# Altium PCB ESP32_C3.PcbDoc
Units mm, origin at the board's own origin, x right, y up, seen from the top; angles counter-clockwise.
Board outline 45.34 x 43.44 mm, 4 copper layers (Top Layer, GND02, signal03, Bottom Layer), stack 0.995 mm thick; 39 components, 42 nets, 202 pads, 101 vias.
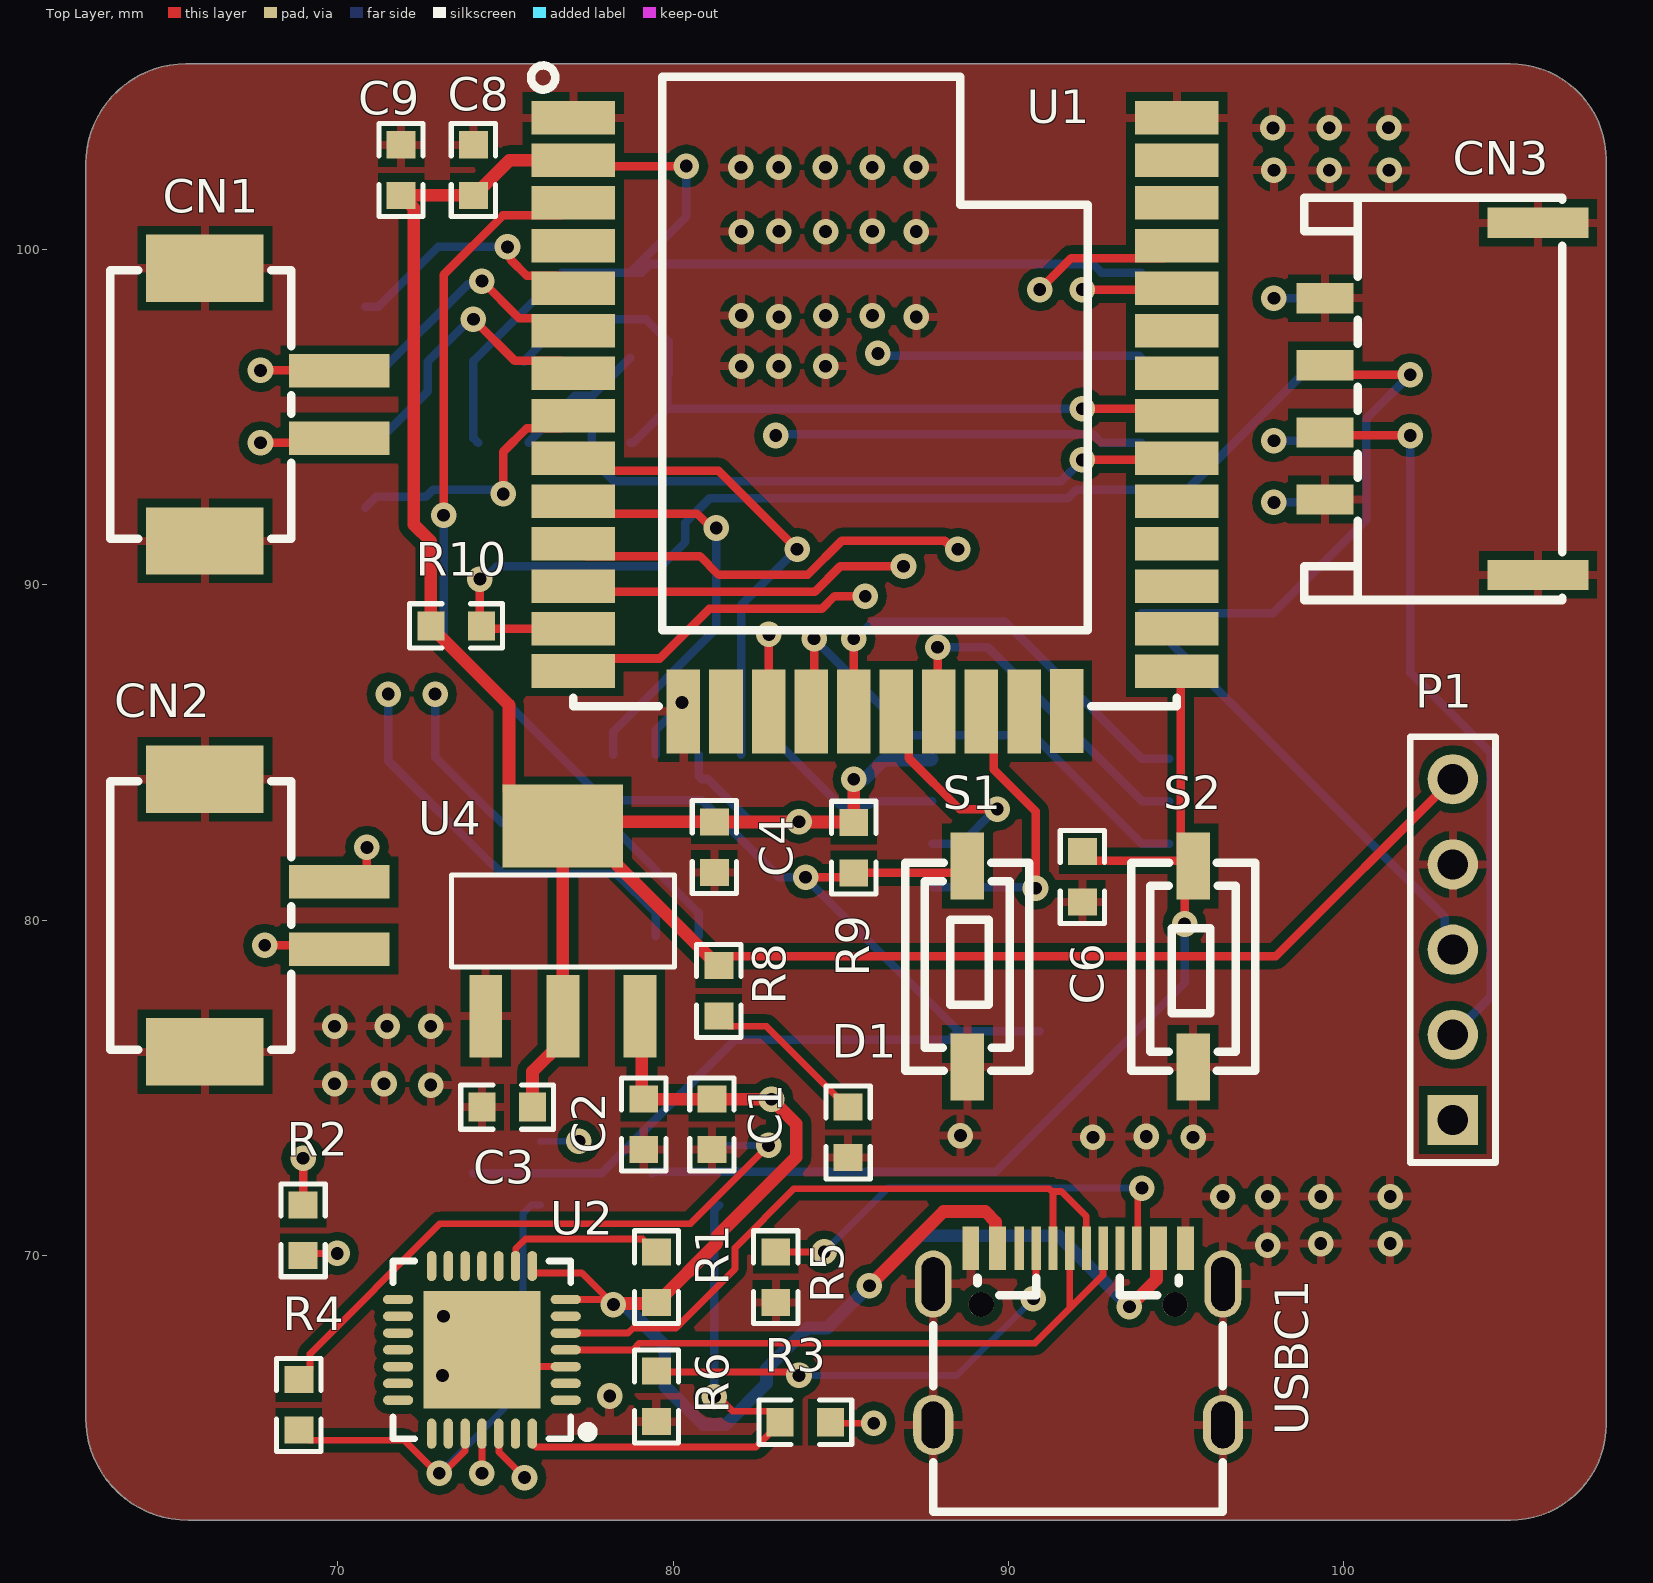
[diagram p0: Top Layer view]
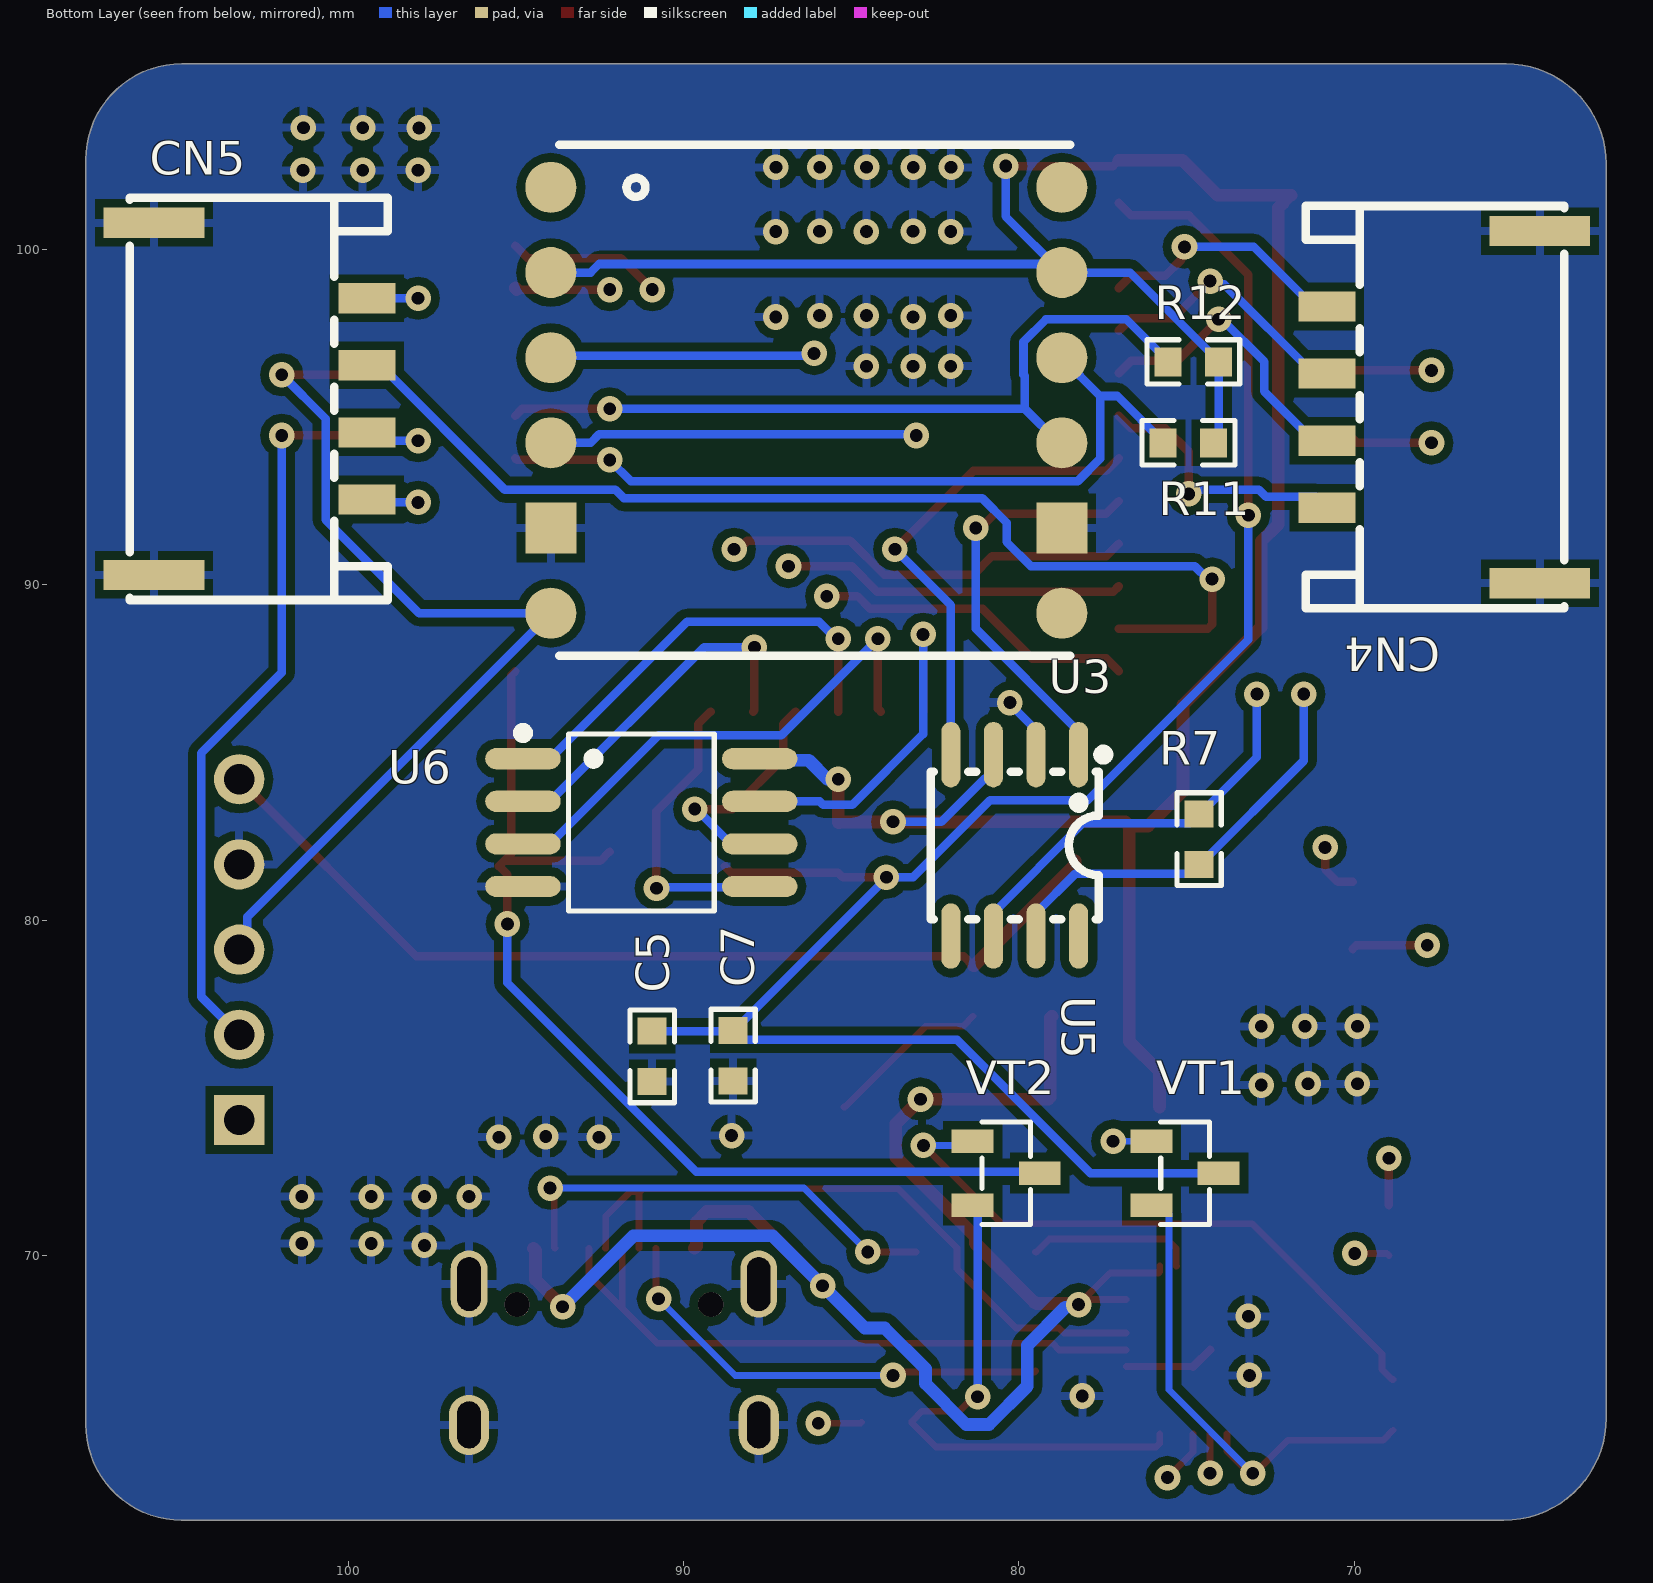
[diagram p1: Bottom Layer view, seen from below]
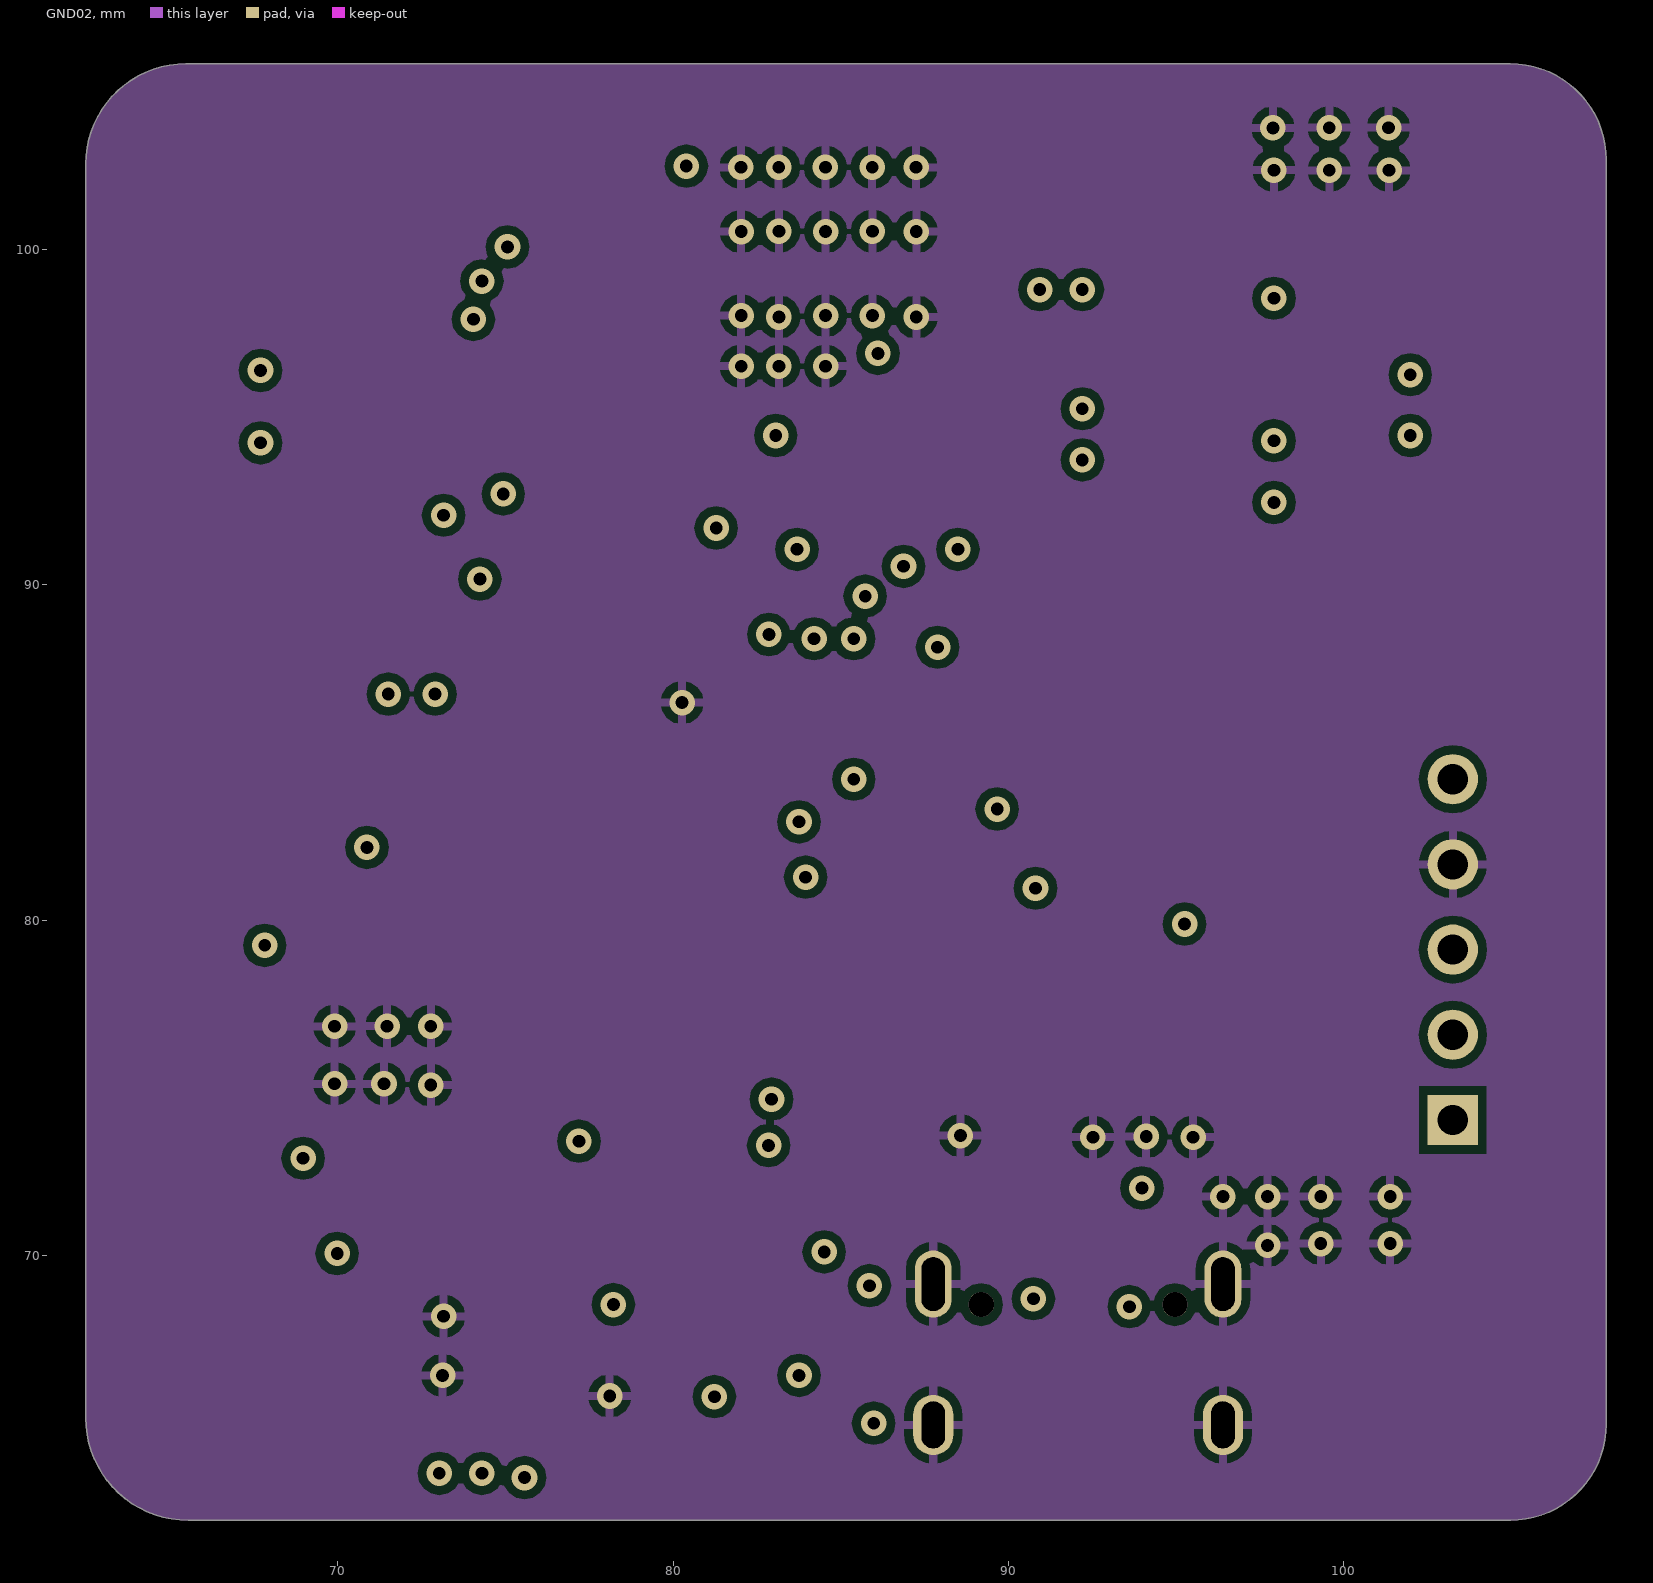
[diagram p2: GND02]
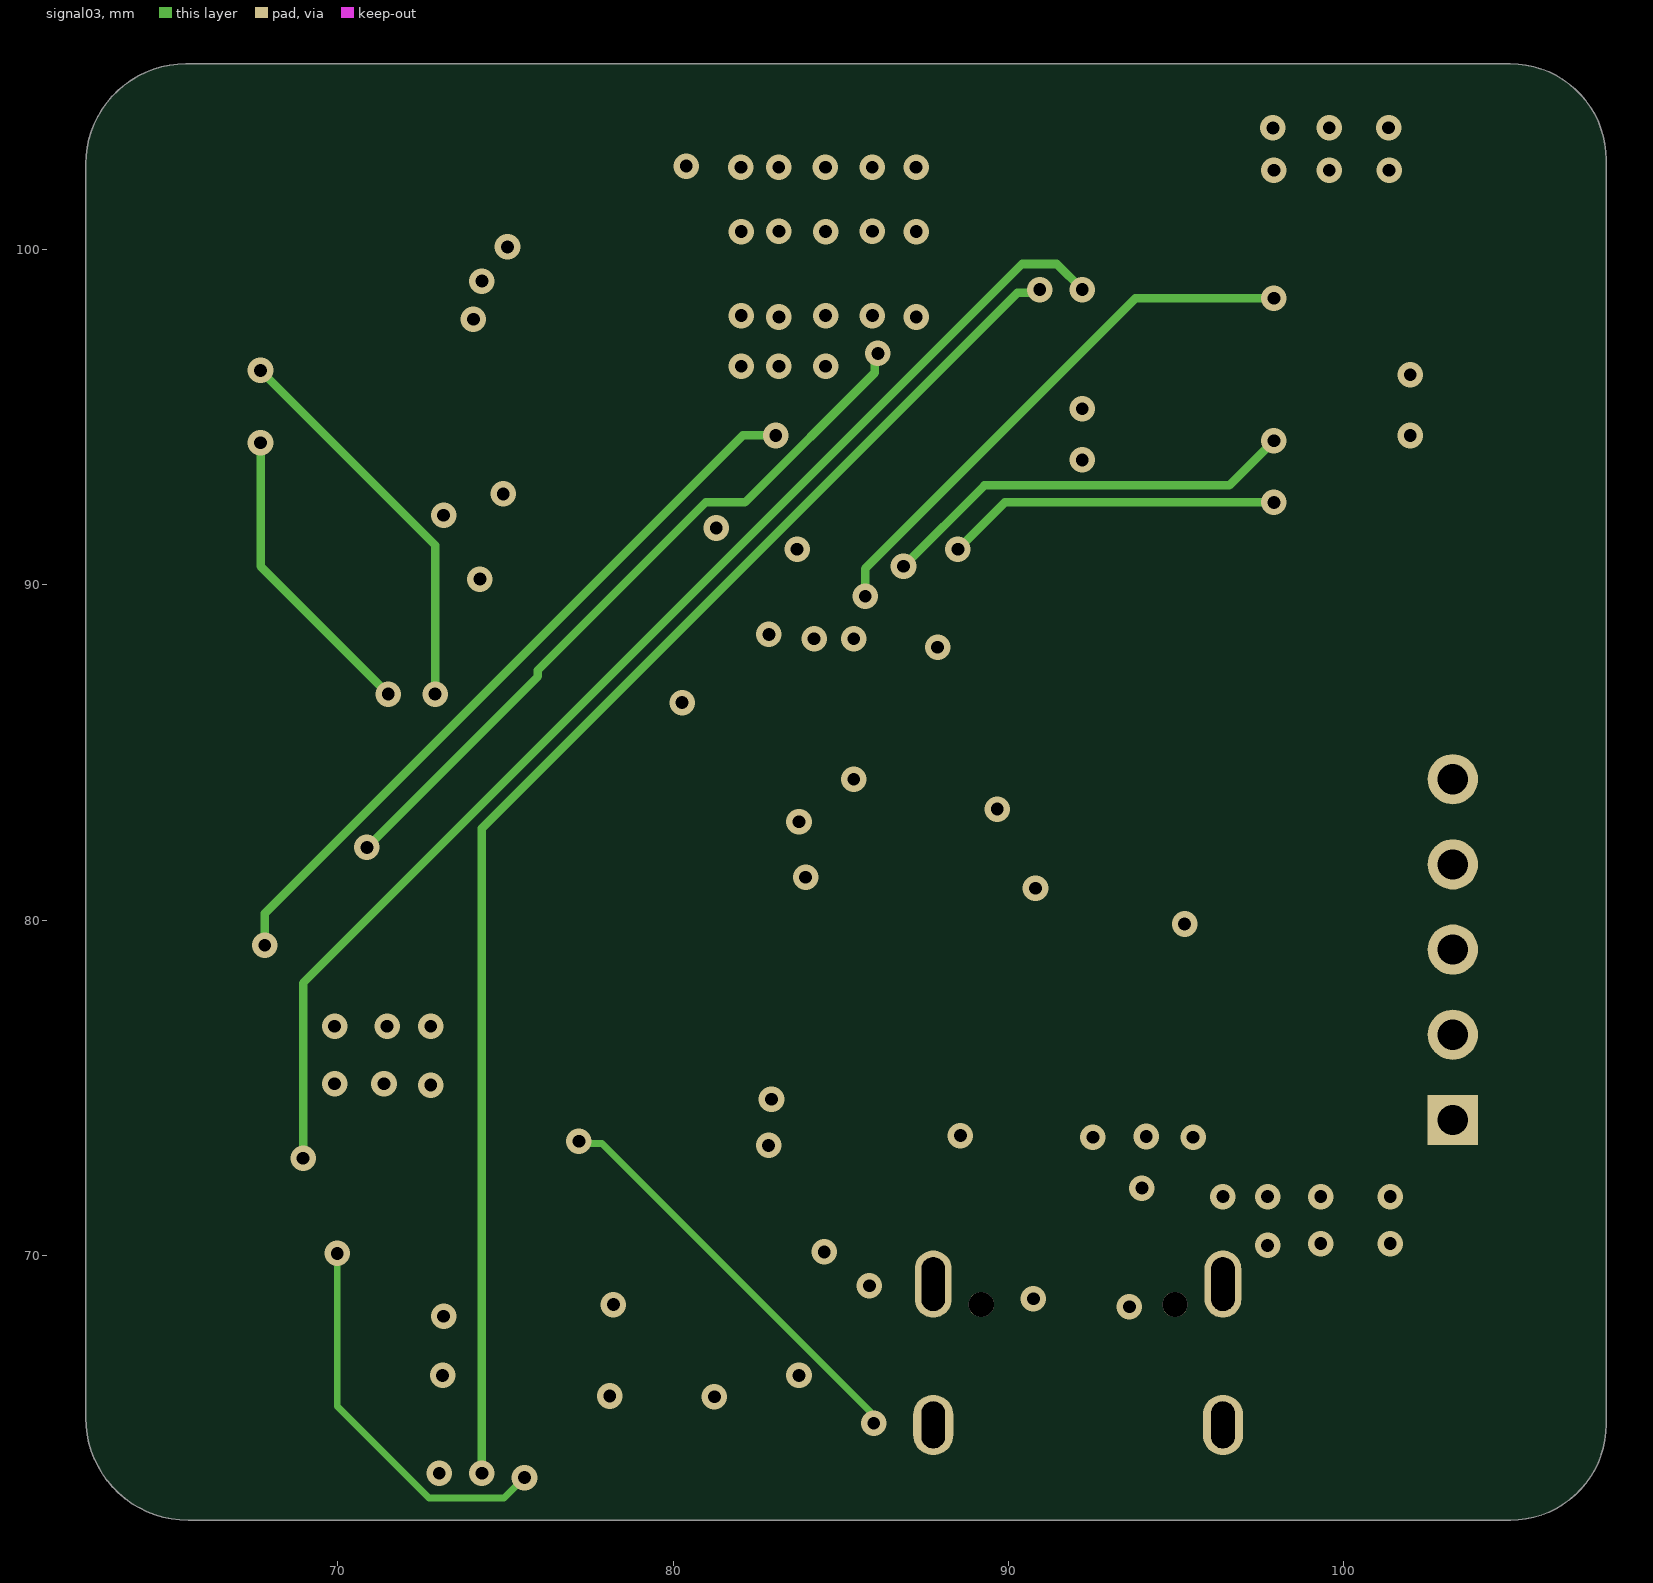
[diagram p3: signal03]

## Layer stack, top to bottom
Top Solder: solder mask 0.0102, Solder Resist, Dk 3.5
Top Layer: signal copper 0.0356
Dielectric 4: prepreg 0.0711, PP-006, Dk 4.1
Dielectric 2: prepreg 0.0711, PP-006, Dk 3.8
Dielectric4: dielectric 0.32, FR-4, Dk 4.8
GND02: signal copper 0.035
Dielectric 1: dielectric 0.32, FR-4, Dk 4.8
signal03: signal copper 0.035
Dielectric 3: prepreg 0.0711, PP-006, Dk 3.8
Bottom Layer: signal copper 0.0356
Bottom Solder: solder mask 0.0102, Solder Resist, Dk 3.5

## Board outline
62.481,65.151 62.481,102.551 62.483,102.552 cw(c65.468,102.552) 65.468,105.538 104.965,105.538 cw(c104.965,102.679) 107.824,102.679 107.824,64.962 107.824,64.961 cw(c104.966,64.961) 104.966,62.102 104.964,62.1 65.532,62.1 cw(c65.532,65.151)

## Design rules (kind name [scope] priority, off if disabled: settings)
Clearance [All] p1: gap=0.254 ignorepadtopadclearanceinfootprint=FALSE except(0: Arc-Hole Track-Hole SMDPad-Hole THPad-Hole Via-Hole Fill-Hole Poly-Hole Region-Hole Text-Hole)
PolygonConnect [All] p1: connectstyle=Relief reliefconductorwidth=0.254 reliefentries=4 polygonreliefangle="90 Angle" airgapwidth=0.254
RoutingVias [All] p1: holewidth=0.254 width=0.508 viastyle="Through Hole" minholewidth=0.203 minwidth=0.254 maxholewidth=0.711 maxwidth=1.27
SolderMaskExpansion [All] p1: expansion=0.102
Width [All] p1: maxlimit=0.508 minlimit=0.203 preferedwidth=0.254
30 further rules are at their usual default settings.

## Components (designator, comment, footprint, x,y, rotation, side; value= is the part's Value field where it differs from the comment)
C1 "Cap" R0603 81.004,72.99 r90 top value=10uF
C2 "Cap" R0603 78.972,72.99 r90 top value=0.1uF
C3 "Cap" R0603 74.133,74.571 r0 top value=0.1uF
C4 "Cap" R0603 81.079,81.263 r90 top value=10uF
C5 "Cap" R0603 91.081,75.022 r90 bottom value=1uF
C6 "Cap" R0603 92.053,80.374 r90 top value=0.1uF
C7 "Cap" R0603 88.668,75.04 r90 bottom value=0.1uF
C8 "Cap" R0603 74.19,103.286 r270 top value=0.1uF
C9 "Cap" R0603 72.031,103.286 r270 top value=10uF
CN1 "PH2.0-2P" CONN-SMD_PH2.0-1X2PW 67.31,95.377 r90 top
CN2 "PH2.0-2P" CONN-SMD_PH2.0-1X2PW 67.31,80.137 r90 top
CN3 "PH2.0-4PWB卧式" CONN-SMD_PH2.0-4PWB 102.941,95.547 r270 top
CN4 "PH2.0-4PWB卧式" CONN-SMD_PH2.0-4PWB 67.31,95.298 r270 bottom
CN5 "PH2.0-4PWB卧式" CONN-SMD_PH2.0-4PWB 102.941,95.547 r90 bottom
D1 "LED3" R0603 85.366,74.584 r270 top
P1 "Header 5" HDR1X5 103.251,74.041 r90 top
R1 "10K" R0603 79.353,68.436 r90 top value=22R
R2 "200R" R0603 69.11,71.663 r270 top value=22R
R3 "12K" R0603 83.023,65.173 r0 top value=22R
R4 "12K" R0603 68.685,64.626 r90 top value=22R
R5 "5.1K" R0603 82.909,68.436 r90 top value=22R
R6 "5.1K" R0603 79.353,64.88 r90 top value=22R
R7 "120R/NC" R0603 74.771,81.499 r90 bottom value=22R
R8 "Res1" R0603 81.211,76.972 r90 top value=2K
R9 "Res1" R0603 85.234,81.245 r90 top value=10K
R10 "Res1" R0603 74.439,88.624 r180 top value=10K
R11 "Res1" R0603 75.854,94.383 r180 bottom value=4.7K
R12 "Res1" R0603 75.709,96.796 r180 bottom value=4.7K
S1 "SW-PB" SW-SMD_L6.1-W3.6-LS7.1 88.773,78.613 r270 top
S2 "SW-PB" SW-SMD_L6.1-W3.6-LS7.1 95.504,78.613 r90 top
U1 "ESP32-C3S-2M" WIFIM-SMD_ESP32-C3S-2M 86.013,98.238 r0 top
U2 "CP2102" QFN-28_L5.0-W5.0-P0.50-BL-EP 74.47,67.183 r90 top value=Value
U3 "SN65HVD232D" SOIC-8_L5.0-W4.0-P1.27-LS6.0-BL 80.755,83.312 r0 bottom
U4 "AMS1117-3.3V" SOT-223-4_L6.5-W3.5-P2.30-LS7.0-BR 406.832,550.589 r270 top
U5 "JY901S" JY901S-15.24*15.24 87.63,95.504 r180 bottom
U6 "W25Q32JVSSIQ" SOIC-8_L5.3-W5.3-P1.27-LS8.0-BL 92.329,82.169 r270 bottom
USBC1 "USB3.1C16PFSMT" USB-C-SMD_TYPE-C-USB-17 92.075,66.548 r0 top
VT1 "S8050" SOT-23-3_L2.9-W1.3-P1.90-LS2.4-BR -355.556,-349.113 r0 bottom
VT2 "S8050" SOT-23-3_L2.9-W1.3-P1.90-LS2.4-BR -350.222,-349.113 r0 bottom

## Footprints (in the part's own frame and the unit in brackets; to place one, negate y for a bottom-side part, rotate by r counter-clockwise, add the part's x,y. Pads: shape width x height; smd on the part's side, far side on the other; paste and mask are expansions set on the pad)
CONN-SMD_PH2.0-1X2PW [mm]
  rect 1x3 smd: 1(-1,-2.733) 2(1,-2.733)
  rect 2x3.5 smd: 3(4.064,1.278) 4(-4.064,1.278)
  silkscreen extent -4,-1.29 4,4.11
CONN-SMD_PH2.0-4PWB [mm]
  rect 0.9x1.7 smd: 1(-3,-3.5) 2(-1,-3.5) 3(1,-3.5) 4(3,-3.5)
  rect 0.9x3 smd: 5(5.25,2.85) 6(-5.25,2.85)
  silkscreen extent -6,-4.12 6,3.57
HDR1X5 [mm] "Connector; Header; 5 Position"
  rect 1.5x1.5 hole 0.9: 1(0,0)
  round 1.5 hole 0.9: 2(2.54,0) 3(5.08,0) 4(7.62,0) 5(10.16,0)
  silkscreen extent -1.27,-1.27 11.43,1.27
JY901S-15.24*15.24 [mil]
  round 60 smd: 1(-249.05,250) 2(-249.05,150) 3(-249.05,50) 4(-249.05,-50) 6(-249.05,-250) 7(350.95,250) 8(350.95,150) 9(350.95,50) 10(350.95,-50) 12(350.95,-250)
  rect 60x60 smd: 5(-249.05,-150) 11(350.95,-150)
  silkscreen extent -239,-300 361,300
QFN-28_L5.0-W5.0-P0.50-BL-EP [mm]
  oval 0.28x0.9 smd: 1(-1.501,-2.325) 2(-1.001,-2.325) 3(-0.501,-2.325) 4(0,-2.325) 5(0.5,-2.325) 6(1.001,-2.325) 7(1.501,-2.325) 15(1.501,2.675) 16(1.001,2.675) 17(0.5,2.675) 18(0,2.675) 19(-0.501,2.675) 20(-1.001,2.675) 21(-1.501,2.675)
  oval 0.9x0.28 smd: 8(2.5,-1.326) 9(2.5,-0.826) 10(2.5,-0.326) 11(2.5,0.175) 12(2.5,0.675) 13(2.5,1.176) 14(2.5,1.676) 22(-2.5,1.676) 23(-2.5,1.176) 24(-2.5,0.675) 25(-2.5,0.175) 26(-2.5,-0.326) 27(-2.5,-0.826) 28(-2.5,-1.326)
  rect 3.5x3.5 smd: 29(0,0.175)
  silkscreen extent -2.65,-3.12 2.65,2.82
R0603 [mm]
  rect 0.806x0.864 smd: 1(0.162,-0.149) 2(1.668,-0.149)
  silkscreen extent -0.47,-0.81 2.3,0.51
SOIC-8_L5.0-W4.0-P1.27-LS6.0-BL [mm]
  oval 0.568x1.95 smd: 1(-2.54,-1.623) 2(-1.27,-1.623) 3(0,-1.623) 4(1.27,-1.623) 5(1.27,3.787) 6(0,3.787) 7(-1.27,3.787) 8(-2.54,3.787)
  silkscreen extent -3.43,-1.77 1.87,3.28
SOIC-8_L5.3-W5.3-P1.27-LS8.0-BL [mm]
  oval 0.63x2.25 smd: 1(-2.644,-2.459) 2(-1.374,-2.459) 3(-0.104,-2.459) 4(1.166,-2.459) 5(1.166,4.601) 6(-0.104,4.601) 7(-1.374,4.601) 8(-2.644,4.601)
  silkscreen extent -3.56,-2.61 1.9,3.25
SOT-23-3_L2.9-W1.3-P1.90-LS2.4-BR [mm]
  rect 1.25x0.7 smd: 1(431.596,-422.514) 2(431.596,-420.614) 3(429.597,-421.564)
  silkscreen extent 429.87,-423.09 431.32,-420.04
SOT-223-4_L6.5-W3.5-P2.30-LS7.0-BR [mm]
  rect 2.47x0.98 smd: 1(473.455,-332.424) 2(473.455,-330.124) 3(473.455,-327.824)
  rect 2.47x3.6 smd: 4(467.785,-330.124)
  silkscreen extent 469.25,-333.45 471.99,-326.8
SW-SMD_L6.1-W3.6-LS7.1 [mm]
  rect 2x1 smd: 1(-3,0) 2(3,0)
  silkscreen extent -3.1,-1.85 3.1,1.85
USB-C-SMD_TYPE-C-USB-17 [mm]
  oval 1.2x1.8 hole 0.7 slot 1.4 at 90 deg: 0(-4.32,-1.604) 0(4.32,-1.604)
  oval 1.1x2 hole 0.7 slot 1.6 at 90 deg: 0(-4.32,2.596) 0(4.32,2.596)
  rect 0.5x1.3 smd: A1(-3.2,3.663) A4(-2.4,3.663) A9(2.4,3.663) A12(3.2,3.663)
  rect 0.28x1.3 smd: A5(-1.25,3.663) A6(-0.25,3.663) A7(0.25,3.663) A8(1.25,3.664) B5(1.75,3.663) B6(0.75,3.663) B7(-0.75,3.663) B8(-1.75,3.664)
  round 0.75 hole 0.75 unplated: ""(-2.89,1.986) ""(2.89,1.986)
  silkscreen extent -4.32,-4.19 4.32,2.78
WIFIM-SMD_ESP32-C3S-2M [mm]
  rect 2.5x1 smd: 1(-8.995,5.691) 2(-8.995,4.421) 3(-8.995,3.151) 4(-8.995,1.881) 5(-8.995,0.611) 6(-8.995,-0.659) 7(-8.995,-1.929) 8(-8.995,-3.199) 9(-8.995,-4.469) 10(-8.995,-5.739) 11(-8.995,-7.009) 12(-8.995,-8.279) 13(-8.995,-9.549) 14(-8.995,-10.809) 25(9.005,-10.819) 26(9.005,-9.549) 27(9.005,-8.279) 28(9.005,-7.009) 29(9.005,-5.739) 30(9.005,-4.469) 31(9.005,-3.199) 32(9.005,-1.929) 33(9.005,-0.659) 34(9.005,0.611) 35(9.005,1.881) 36(9.005,3.151) 37(9.005,4.421) 38(9.005,5.691)
  rect 1x2.5 smd: 15(-5.71,-12.018) 16(-4.44,-12.018) 17(-3.17,-12.018) 18(-1.9,-12.018) 19(-0.63,-12.018) 20(0.64,-12.018) 21(1.91,-12.018) 22(3.18,-12.018) 23(4.45,-12.018) 24(5.72,-12.003)
  silkscreen extent -10.25,-11.86 9.01,7.25

## Part data
C1 C2 C3 C4 C5 C6 C7 C8 C9: "Capacitor", LatestRevisionDate=17-Jul-2002, LatestRevisionNote="Re-released for DXP Platform.", PackageDescription="Radial Cap, Thru-Hole; 2 Leads; 0.3 in Pin Spacing", PackageReference=RAD-0.3, Published=8-Jun-2000, Publisher="Altium Limited"
D1: "Typical BLUE SiC LED", DatasheetVersion=16-Apr-2002, LatestRevisionDate=17-Dec-2003, LatestRevisionNote="PCB Footprint replaced.", PackageDescription="SM LED; 2 C-Bend Leads; Body 3.5 x 2.8 x 1.9 mm, inc leads (LxWxH typ)", PackageReference=3.5X2.8X1.9, PackageVersion=16-Apr-2002, Published=8-Jun-2000, Publisher="Altium Limited"
P1: "Header, 5-Pin", LatestRevisionDate=17-Jul-2002, LatestRevisionNote="Re-released for DXP Platform.", Publisher="Altium Limited"
R1 R2 R3 R4 R5 R6 R7: library part 电阻-0402, "Resistor"
R8 R9 R10 R11 R12: "Resistor", LatestRevisionDate=17-Jul-2002, LatestRevisionNote="Re-released for DXP Platform.", PackageDescription="Axial Device, Thru-Hole; 2 Leads; 0.3 in Pin Spacing", PackageReference=AXIAL-0.3, Published=8-Jun-2000, Publisher="Altium Limited"
S1 S2: "Switch", LatestRevisionDate=17-Jul-2002, LatestRevisionNote="Re-released for DXP Platform.", PackageDescription="Switch; 2 Leads", PackageReference=SPST-2, Published=24-Mar-1999, Publisher="Altium Limited"
U2: "USBתTTL", MFG #1="SILICON LABS", PART DESC="SINGLE-CHIP USB TO UART BRIDGE, QFN28, RoHS.", PART NUMBER=CP2102, RefDes=RefDes, Type=DEV
U3: Manufacturer="Texas Instruments", Manufacturer Part Number=SN65HVD232DR, Operating Temperature="-40°C ~ 85°", Package / Case="8-SOIC (0.154\", 3.90mm Width)", Supplier Device Package=8-SOIC, Supplier Part Number 1=296-26344-2-ND, Voltage - Supply="3 V ~ 3.6 V", Category="Integrated Circuits (ICs)", ComponentLink1Description=http://www.ti.com/lit/ds/symlink/sn65hvd230.pdf, ComponentLink1URL=http://www.ti.com/lit/ds/symlink/sn65hvd230.pdf, Data Rate=1Mbps, Duplex=Half, Mounting Type="Surface Mount", Number of Drivers/Receivers=1/1, Packaging="Tape & Reel (TR)", Part Status=Active, Pricing 1="2500=0.84375 (USD)", Pricing 2="1=2.05, 10=1.842, 100=1.4809, 500=1.21668, 1000=1.00811 (USD)", Protocol=CAN, RoHS="RoHS Compliant", Stock=5000, Supplier 1=Digi-Key, Supplier 2=Digi-Key, Supplier Part Number 2=296-26344-1-ND, Type=Transceiver
VT1 VT2: library part SMT_TRIODE_NPN, "Surface mount NPN transistor, package SOT-23"

## Via types
v1: diameter 0.762, hole 0.381, Top Layer to Bottom Layer, 101 vias

## Nets (pads, with @x,y where several pads share a name; then routed paths per layer and width w, separated by ;. In a path a pad name is that pad's centre, name@x,y a point inside that pad or via, vN(x,y) a via of type N, cw(c..) or ccw(c..) an arc to the next point about the centre after c; other vN are vias at no path point)
CAN_H: CN1.1 R7.1 U3.7 | length 24
  Top Layer w0.254: v1(67.691,94.234) 69.9,94.234 CN1.1
  signal03 w0.254: v1(67.691,94.234) 67.691,90.551 v1(71.501,86.741)
  Bottom Layer w0.254: v1(71.501,86.741) 71.501,84.753 74.593,81.661 R7.1 74.898,81.385 78.316,81.385 79.485,80.216 U3.7
CAN_L: CN1.2 R7.2 U3.6 | length 26.5
  Top Layer w0.254: v1(67.691,96.393) 70.027,96.393 CN1.2
  signal03 w0.254: v1(67.691,96.393) 72.898,91.186 v1(72.898,86.741)
  Bottom Layer w0.254: v1(72.898,86.741) 72.898,84.863 74.593,83.167 R7.2 74.898,82.891 78.08,82.891 80.755,80.216 U3.6
CAN_Rx: U1.9 U3.4 | length 14.6
  Top Layer w0.254: U1.9 77.392,93.396 81.356,93.396 v1(83.693,91.059)
  Bottom Layer w0.254: U3.4 82.025,89.391 v1(83.693,91.059)
CAN_Tx: U1.10 U3.1 | length 12.6
  Top Layer w0.254: U1.10 77.392,92.126 80.711,92.126 81.143,91.694 v1(81.28,91.694)
  Bottom Layer w0.254: U3.1 78.215,85.626 81.28,88.69 v1(81.28,91.694)
CP_Rx: U1.35 U2.25 | length 48.3
  Top Layer w0.203: v1(74.295,63.5) U2.25
  Top Layer w0.254: v1(90.932,98.806) 91.872,99.746 94.646,99.746 U1.35
  signal03 w0.254: v1(74.295,63.5) 74.295,82.739 90.265,98.709 90.835,98.709 v1(90.932,98.806)
CP_Tx: R2.1 U1.34 | length 41.9
  Top Layer w0.254: R2.1 v1(68.961,72.898) ; v1(92.202,98.806) U1.34@94.976,98.806
  Top Layer w0.381: U1.34@94.976,98.806 U1.34
  signal03 w0.254: v1(68.961,72.898) 68.961,78.123 90.406,99.568 91.44,99.568 v1(92.202,98.806)
DTR: R3.1 U2.28 VT2.2 | length 16.1
  Top Layer w0.203: U2.28 75.796,64.394 75.907,64.283 82.472,64.283 83.185,64.995 83.185,65.053 82.883,65.354 81.766,65.354 81.334,65.786 v1(81.228,65.786)
  Bottom Layer w0.254: v1(81.228,65.786) 81.228,71.354 VT2.2
EN: C5.2 C7.2 R9.1 S1.1 U1.3 VT1.3 | length 59.4
  Top Layer w0.254: v1(73.152,92.075) 73.152,99.249 74.919,101.016 76.646,101.016 U1.3 ; v1(83.947,81.28) 85.257,81.28 R9.1 88.567,81.407 S1.1
  Bottom Layer w0.254: v1(73.152,92.075) 73.152,88.367 77.94,83.579 80.852,83.579 83.151,81.28 v1(83.947,81.28) 83.947,81.251 C7.2@88.49,76.708 ; VT1.3 77.861,72.451 81.842,76.432 88.243,76.432 C7.2 88.537,76.69 C5.2
GND: C1.1 C2.1 C3.1 C4.1 C5.1 C6.1 C7.1 C8.1 C9.1 CN1.3 CN1.4 CN2.3 CN2.4 CN3.1 CN3.4 CN3.5 CN3.6 CN4.5 CN4.6 CN5.5 CN5.6 D1.2 P1.4 R5.1 R6.1 S1.2 S2.1 U1.1 U1.15 U1.38 U2.3 U2.29 U3.2 U4.1 U5.5 U5.11 U6.4 USBC1.0 USBC1.A1 USBC1.A12 | length 4.7
  Top Layer w0.203: U2.29@74.795,66.683 U2.3 ; v1(78.105,65.806) v1@78.105,65.919
  Top Layer w0.254: U2.29 U2.29@74.795,66.683
  Bottom Layer w0.254: U3.2 79.485,85.667 80.264,86.446 v1(80.264,86.487)
  other v1: 73.122,66.421 73.152,68.184 97.726,70.296 99.314,70.352 101.383,70.352 96.393,71.755 97.726,71.755 99.314,71.755 101.383,71.755 92.518,73.527 94.107,73.545 95.504,73.527 88.566,73.573 72.771,75.079 69.9,75.116 71.374,75.116 69.9,76.832 71.464,76.835 72.771,76.832 82.025,96.52 83.151,96.52 84.545,96.52 83.151,97.988 87.249,97.988 82.025,98.03 84.545,98.03 85.942,98.03 82.025,100.534 84.545,100.534 87.249,100.534 83.151,100.548 85.942,100.548 97.917,102.366 99.568,102.362 101.35,102.362 82.019,102.452 83.144,102.452 84.539,102.452 85.935,102.452 87.243,102.452 97.887,103.627 99.568,103.632 101.334,103.632
GPIO0: CN4.1 U1.5 | length 7.6
  Top Layer w0.254: v1(75.057,100.076) 75.154,99.979 75.154,99.695 75.627,99.222 76.646,99.222 U1.5
  Bottom Layer w0.254: CN4.1 71.21,98.298 72.988,100.076 v1(75.057,100.076)
GPIO1: CN4.2 U1.6 | length 8
  Top Layer w0.254: v1(74.295,99.06) 75.403,97.952 76.646,97.952 U1.6
  Bottom Layer w0.254: CN4.2 71.21,96.298 73.875,98.963 74.198,98.963 v1(74.295,99.06)
GPIO2: CN4.3 U1.7 | length 8.9
  Top Layer w0.254: v1(74.041,97.917) 75.276,96.682 76.646,96.682 U1.7
  Bottom Layer w0.254: CN4.3 71.21,94.298 72.678,95.766 72.678,96.658 73.937,97.917 v1(74.041,97.917)
GPIO3: CN4.4 U1.8 | length 8.2
  Top Layer w0.254: v1(74.93,92.71) 74.93,93.969 75.627,94.666 76.646,94.666 U1.8
  Bottom Layer w0.254: CN4.4 71.133,92.621 72.621,92.621 72.836,92.837 74.666,92.837 74.793,92.71 v1(74.93,92.71)
GPIO6: CN5.1 U1.11 | length 23.8
  Top Layer w0.254: U1.11 77.392,90.856 80.796,90.856 81.355,90.297 84.009,90.297 85.025,91.313 88.099,91.313 88.353,91.059 v1(88.49,91.059)
  signal03 w0.254: v1(88.49,91.059) 89.887,92.456 v1@97.79,92.456
  Bottom Layer w0.254: v1(97.917,92.456) 99.35,92.456 CN5.1
GPIO7: CN5.2 U1.12 | length 24.4
  Top Layer w0.254: U1.12 77.189,89.789 84.219,89.789 84.981,90.551 v1(86.868,90.551)
  signal03 w0.254: v1(86.868,90.551) 89.281,92.964 96.583,92.964 v1@97.853,94.234
  Bottom Layer w0.254: v1(97.917,94.298) 99.192,94.298 CN5.2
GPIO8: CN5.3 R10.1 U1.13 | length 32.3
  Top Layer w0.254: v1(74.234,90.17) 74.234,88.816 R10.1 ; R10.1@74.361,88.689 U1.13
  Bottom Layer w0.254: v1(74.234,90.17) 74.371,90.17 74.752,90.551 79.636,90.551 80.364,91.279 80.364,91.855 81.091,92.583 91.777,92.583 92.031,92.837 95.331,92.837 99.041,96.547 CN5.3
GPIO9: C6.2 S2.2 U1.25 VT2.3 | length 31.1
  Top Layer w0.254: C6.2 92.478,81.766 S2.2@95.351,81.766 ; U1.25 95.131,87.307 95.131,81.986 S2.2@95.351,81.766 ; v1(95.25,79.883) 95.25,81.359 S2.2 S2.2@95.351,81.766
  Bottom Layer w0.254: VT2.3 79.416,72.492 89.614,72.492 95.25,78.128 v1(95.25,79.883)
GPIO10: CN5.4 U1.14 | length 27.6
  Top Layer w0.254: U1.14 77.392,87.802 79.597,87.802 81.076,89.281 84.429,89.281 84.81,89.662 v1(85.725,89.662)
  signal03 w0.254: v1(85.725,89.662) 85.725,90.486 93.786,98.547 v1@98.039,98.547
  Bottom Layer w0.254: v1(97.917,98.547) CN5.4
GPS_RX: CN3.3 P1.2 | length 21.9
  Top Layer w0.254: CN3.3 99.535,94.453 v1(101.981,94.453)
  Bottom Layer w0.254: v1(101.981,94.453) 101.981,87.383 104.382,84.982 104.382,77.712 P1.2
GPS_TX: CN3.2 P1.3 U5.6 | length 29.3
  Top Layer w0.254: CN3.2 99.722,96.266 v1(101.981,96.266)
  Bottom Layer w0.254: v1(101.981,96.266) 100.672,94.957 100.672,91.939 97.887,89.154 U5.6 103.013,80.097 103.013,79.359 P1.3
MPU_RX: CN2.2 U5.3 | length 31.3
  Top Layer w0.254: CN2.2 70.493,81.137 70.866,81.51 v1(70.866,82.169)
  signal03 w0.254: v1(70.866,82.169) 75.964,87.267 75.964,87.455 80.964,92.456 82.138,92.456 86.009,96.327 86.009,96.804 v1(86.106,96.901)
  Bottom Layer w0.254: v1(86.106,96.901) 86.169,96.837 93.892,96.837 U5.3
MPU_SCL: R11.1 U1.30 U5.9 | length 24
  Top Layer w0.254: v1(92.202,93.726) 94.976,93.726 U1.30
  Bottom Layer w0.254: R11.1 75.692,94.263 77.06,95.631 77.573,95.631 ; U5.9 77.573,95.631 ; v1(92.202,93.726) 91.567,93.091 78.243,93.091 77.573,93.761 77.573,95.631
MPU_SDA: R12.1 U1.31 U5.10 | length 24
  Top Layer w0.254: v1(92.202,95.25) 94.808,95.25 U1.31
  Bottom Layer w0.254: R12.1 75.547,96.676 76.789,97.917 79.189,97.917 79.859,97.247 79.859,96.268 79.82,96.229 79.82,95.25 ; U5.10 78.804,94.234 79.82,95.25 ; v1(92.202,95.25) 79.82,95.25
MPU_TX: CN2.1 U5.4 | length 35.4
  Top Layer w0.254: v1(67.818,79.248) 69.932,79.248 CN2.1
  signal03 w0.254: v1(67.818,79.248) 67.818,80.199 82.073,94.453 v1(83.058,94.453)
  Bottom Layer w0.254: v1(83.058,94.453) 83.093,94.488 92.518,94.488 92.772,94.234 U5.4
NetD1_1: D1.1 R8.1 | length 5
  Top Layer w0.203: R8.1 81.662,76.832 82.778,76.832 85.188,74.422 D1.1
NetR1_2: R1.2 U2.9 | length 5
  Top Layer w0.203: U2.9 75.301,69.688 75.301,70.198 75.591,70.489 79.089,70.489 79.473,70.104 R1.2
NetR2_2: R2.2 U2.26 | length 14.2
  Top Layer w0.203: R2.2 69.024,70.058 v1(69.977,70.058) ; U2.26 74.8,64.678 74.8,64.138 v1(75.565,63.373)
  signal03 w0.203: v1(69.977,70.058) 69.977,65.506 72.72,62.763 74.955,62.763 v1(75.565,63.373)
NetR3_2: R3.2 VT1.1 | length 14.7
  Top Layer w0.203: R3.2 84.72,64.995 85.721,64.995 85.725,64.999 v1@85.725,65.042
  signal03 w0.203: v1(77.189,73.406) 77.254,73.34 77.874,73.34 85.872,65.342 85.872,65.102 v1(85.979,64.995)
  Bottom Layer w0.203: VT1.1 76.046,73.406 v1(77.189,73.406)
NetR4_2: R4.2 VT2.1 | length 18.7
  Top Layer w0.203: R4.2 68.863,66.294 69.164,66.596 69.164,67.065 73.046,70.946 80.511,70.946 v1(82.844,73.279)
  Bottom Layer w0.203: VT2.1 81.497,73.279 v1(82.844,73.279)
NetR5_2: R5.2 USBC1.B5 | length 13.6
  Top Layer w0.203: R5.2 v1(84.501,70.104) ; USBC1.B5 93.853,70.239 93.853,71.882 v1(93.98,72.009)
  Bottom Layer w0.203: v1(84.501,70.104) 86.406,72.009 v1(93.98,72.009)
NetR6_2: R6.2 USBC1.A5 | length 13.8
  Top Layer w0.203: R6.2 79.527,66.523 83.65,66.523 v1(83.752,66.421) ; v1(90.742,68.707) 90.821,68.786 90.821,70.206 USBC1.A5
  Bottom Layer w0.203: v1(83.752,66.421) 88.456,66.421 v1(90.742,68.707)
RTS: R4.1 U2.24 VT1.2 | length 15.7
  Top Layer w0.203: R4.1 69.136,64.486 71.98,64.486 72.966,63.5 73.122,63.5 73.79,64.168 73.79,64.678 U2.24
  Bottom Layer w0.203: v1(73.025,63.5) 75.517,65.992 75.517,71.253 75.766,71.501 VT1.2
SPICLK: U1.20 U6.6 | length 7.2
  Top Layer w0.254: U1.20 87.027,85.847 87.027,84.828 88.542,83.312 v1(89.662,83.312)
  Bottom Layer w0.254: U6.6 88.58,82.273 89.619,83.312 v1(89.662,83.312)
SPICS0: U1.19 U6.1 | length 13.5
  Top Layer w0.254: U1.19 v1(85.384,88.392)
  Bottom Layer w0.254: v1(85.384,88.392) 85.445,88.392 85.953,88.9 89.891,88.9 93.978,84.813 U6.1
SPID: U1.22 U6.5 | length 9
  Top Layer w0.254: U1.22 89.567,85.847 89.567,84.485 90.805,83.247 v1(90.805,80.951)
  Bottom Layer w0.254: U6.5 87.754,80.977 90.779,80.977 v1(90.805,80.951)
SPIHD: U1.17 U6.7 | length 11.1
  Top Layer w0.254: U1.17 82.855,86.231 v1(82.855,88.519)
  Bottom Layer w0.254: v1(82.855,88.519) 82.855,85.547 84.963,83.439 85.837,83.439 85.942,83.543 U6.7
SPIQ: U1.21 U6.2 | length 10.7
  Top Layer w0.254: v1(87.884,88.138) 87.884,86.259 U1.21
  Bottom Layer w0.254: v1(87.884,88.138) 89.383,88.138 93.978,83.543 U6.2
SPIWP: U1.18 U6.3 | length 15.3
  Top Layer w0.254: U1.18 84.201,86.307 v1(84.201,88.392)
  Bottom Layer w0.254: v1(84.201,88.392) 87.084,85.509 90.742,85.509 93.978,82.273 U6.3
USB-PWR-DM: U2.5 USBC1.A7 USBC1.B7 | length 20.7
  Top Layer w0.203: U2.5 78.653,67.683 78.808,67.839 80.081,67.839 81.843,69.601 81.843,70.227 83.605,71.989 91.206,71.989 91.291,71.904 ; USBC1.B7 91.325,71.87 91.291,71.904 ; USBC1.A7 92.321,70.215 92.321,71.162 91.579,71.904 91.291,71.904
USB-PWR-DP: U2.4 USBC1.A6 USBC1.B6 | length 19.5
  Top Layer w0.203: U2.4 78.799,67.183 78.997,67.381 90.788,67.381 92.821,69.414 92.821,70.206 USBC1.B6 ; 91.825,68.453 USBC1.A6
VBUS: C1.2 C2.2 R1.1 U2.7 U2.8 U4.3 USBC1.A4 USBC1.A9 | length 48.5
  Top Layer w0.203: U2.8 75.796,69.51 75.832,69.475 76.927,69.475 ; U2.7 77.914,68.684 78.064,68.534 v1(78.215,68.534) 77.274,69.475 76.962,69.475
  Top Layer w0.381: v1(78.215,68.534) 78.247,68.566 79.47,68.566 R1.1 79.531,68.598 81.297,70.364 81.297,70.565 83.669,72.937 83.669,73.92 v1(82.931,74.658) C1.2 C2.2 79.064,74.715 79.064,77.078 U4.3 ; v1(85.852,69.097) 88.061,71.306 89.309,71.306 89.616,70.999 89.616,70.271 USBC1.A4 ; v1(93.605,68.471) 94.416,69.281 94.416,70.152 USBC1.A9
  Bottom Layer w0.381: 78.613,68.453 79.749,67.317 79.749,66.097 80.886,64.96 81.57,64.96 82.785,66.176 82.785,66.622 84,67.837 84.592,67.837 87.343,70.588 91.488,70.588 v1(93.605,68.471)
VCC_3V3: C3.2 C4.2 C8.2 C9.2 P1.5 R8.2 R9.2 R10.2 R11.2 R12.2 U1.2 U3.3 U4.2 U4.4 U5.2 U5.8 U6.8 | length 111.9
  Top Layer w0.254: U1.2 77.189,102.489 v1(80.391,102.489) ; R8.2 81.637,78.917 97.967,78.917 P1.5
  Top Layer w0.381: C9.2 C9.2@71.911,101.618 ; C3.2 75.801,75.482 76.708,76.389 U4.2 U4.4 ; U1.2 75.111,102.659 74.07,101.618 C8.2 C9.2@71.911,101.618 ; U4.4@78.317,81.76 78.317,81.655 81.332,78.64 R8.2 ; v1(85.384,84.201) R9.2 ; C9.2@71.911,101.618 72.124,101.405 72.124,101.376 72.263,101.237 72.263,91.797 72.771,91.289 R10.2 72.771,88.744 75.099,86.417 75.099,83.848 76.143,82.804 U4.4 ; U4.4 76.835,82.931 C4.2 81.236,82.922 R9.2@85.346,82.922 ; R9.2@85.346,82.922 85.355,82.913 R9.2 ; R9.2@85.346,82.922 85.375,82.922 R9.2
  Bottom Layer w0.254: R11.2 74.041,94.379 R12.2 74.041,96.676 76.679,99.314 U5.8 ; v1(80.391,102.489) 80.391,100.989 U5.8 ; U3.3 80.755,84.295 80.842,84.208 81.031,84.208 82.308,82.931 v1(83.752,82.931) ; U5.2 92.772,99.314 92.518,99.568 79.314,99.568 79.06,99.314 U5.8
  Bottom Layer w0.381: v1(85.384,84.201) 85.701,84.201 86.266,84.766 87.68,84.766 U6.8
pads on no net: P1.1 U1.4 U1.16 U1.23 U1.24 U1.26 U1.27 U1.28 U1.29 U1.32 U1.33 U1.36 U1.37 U2.1 U2.2 U2.6 U2.10 U2.11 U2.12 U2.13 U2.14 U2.15 U2.16 U2.17 U2.18 U2.19 U2.20 U2.21 U2.22 U2.23 U2.27 U3.5 U3.8 U5.1 U5.7 U5.12 USBC1. USBC1.A8 USBC1.B8

## Polygon pours and split planes (outlines as drawn)
GND on GND02 "GND_L02_P001" (solid, remove dead copper, pour order 1): 62.481,65.151 62.481,102.551 62.483,102.552 cw(c65.468,102.552) 65.468,105.538 104.965,105.538 cw(c104.965,102.679) 107.824,102.679 107.824,64.962 107.824,64.961 cw(c104.966,64.961) 104.966,62.102 104.964,62.1 65.532,62.1 cw(c65.532,65.151)
GND on Bottom Layer "GND_L04_P003" (solid, remove dead copper, pour order 3): 62.481,65.151 62.481,102.551 62.483,102.552 cw(c65.468,102.552) 65.468,105.538 104.965,105.538 cw(c104.965,102.679) 107.824,102.679 107.824,64.962 107.824,64.961 cw(c104.966,64.961) 104.966,62.102 104.964,62.1 65.532,62.1 cw(c65.532,65.151)
GND on Top Layer "GND_L01_P000" (solid, remove dead copper, pour order 0): 62.481,65.151 62.481,102.551 62.483,102.552 cw(c65.468,102.552) 65.468,105.538 104.965,105.538 cw(c104.965,102.679) 107.824,102.679 107.824,64.962 107.824,64.961 cw(c104.966,64.961) 104.966,62.102 104.964,62.1 65.532,62.1 cw(c65.532,65.151)

## Silkscreen, mask and mechanical layers (free items; w line width, h text height)
Mechanical 1:
  lines w0.254: 104.965,105.538 cw(c104.965,102.679) 107.824,102.679 107.824,64.962 107.824,64.961 cw(c104.966,64.961) 104.966,62.102 104.964,62.1 65.532,62.1 cw(c65.532,65.151) 62.481,65.151 62.481,102.551 62.483,102.552 cw(c65.468,102.552) 65.468,105.538 104.965,105.538 ; 104.965,105.538 104.965,105.538